# Altium PCB PCB Isolated gate driver module.PcbDoc
Units mil, origin at the board's own origin, x right, y up, seen from the top; angles counter-clockwise.
Board outline 1299.21 x 1230.31 mil, 4 copper layers (Top Layer, Gnd, Vcc, Bottom Layer), stack 76.567 mil thick; 35 components, 20 nets, 101 pads, 13 vias.
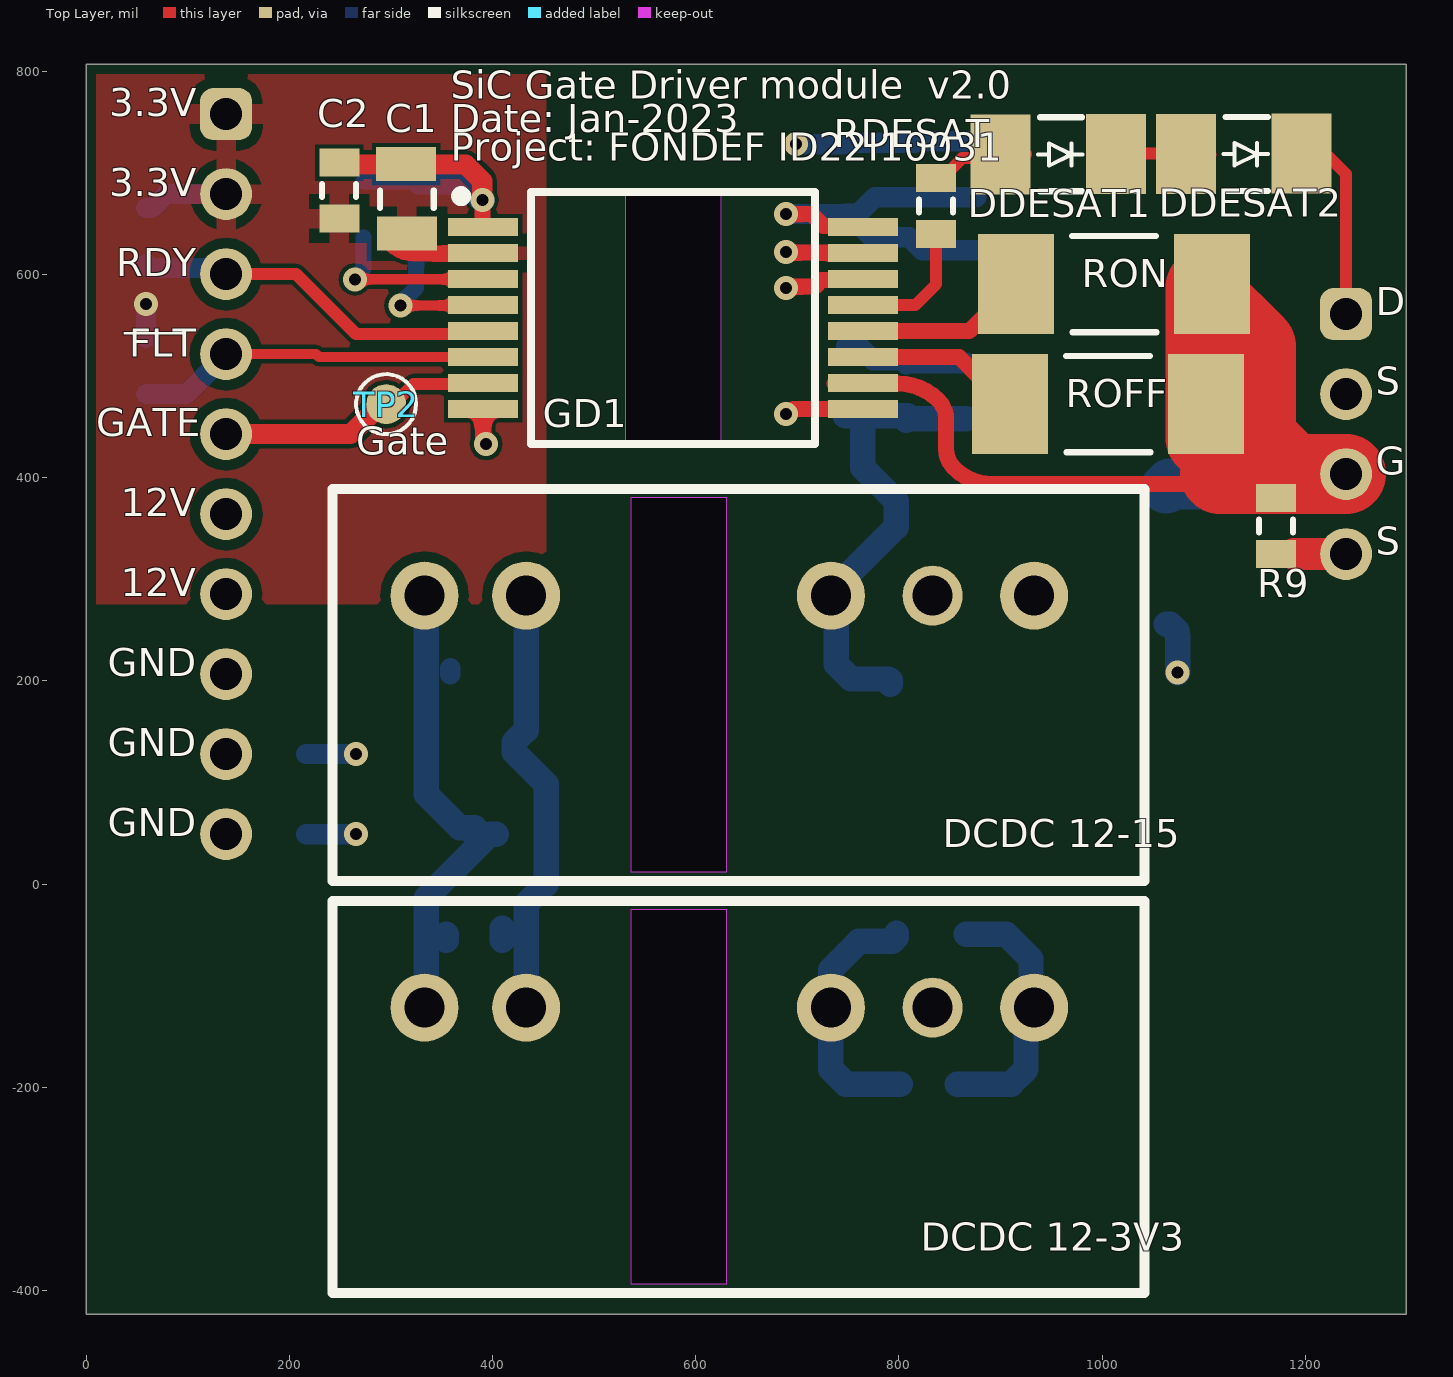
[diagram p0: Top Layer view]
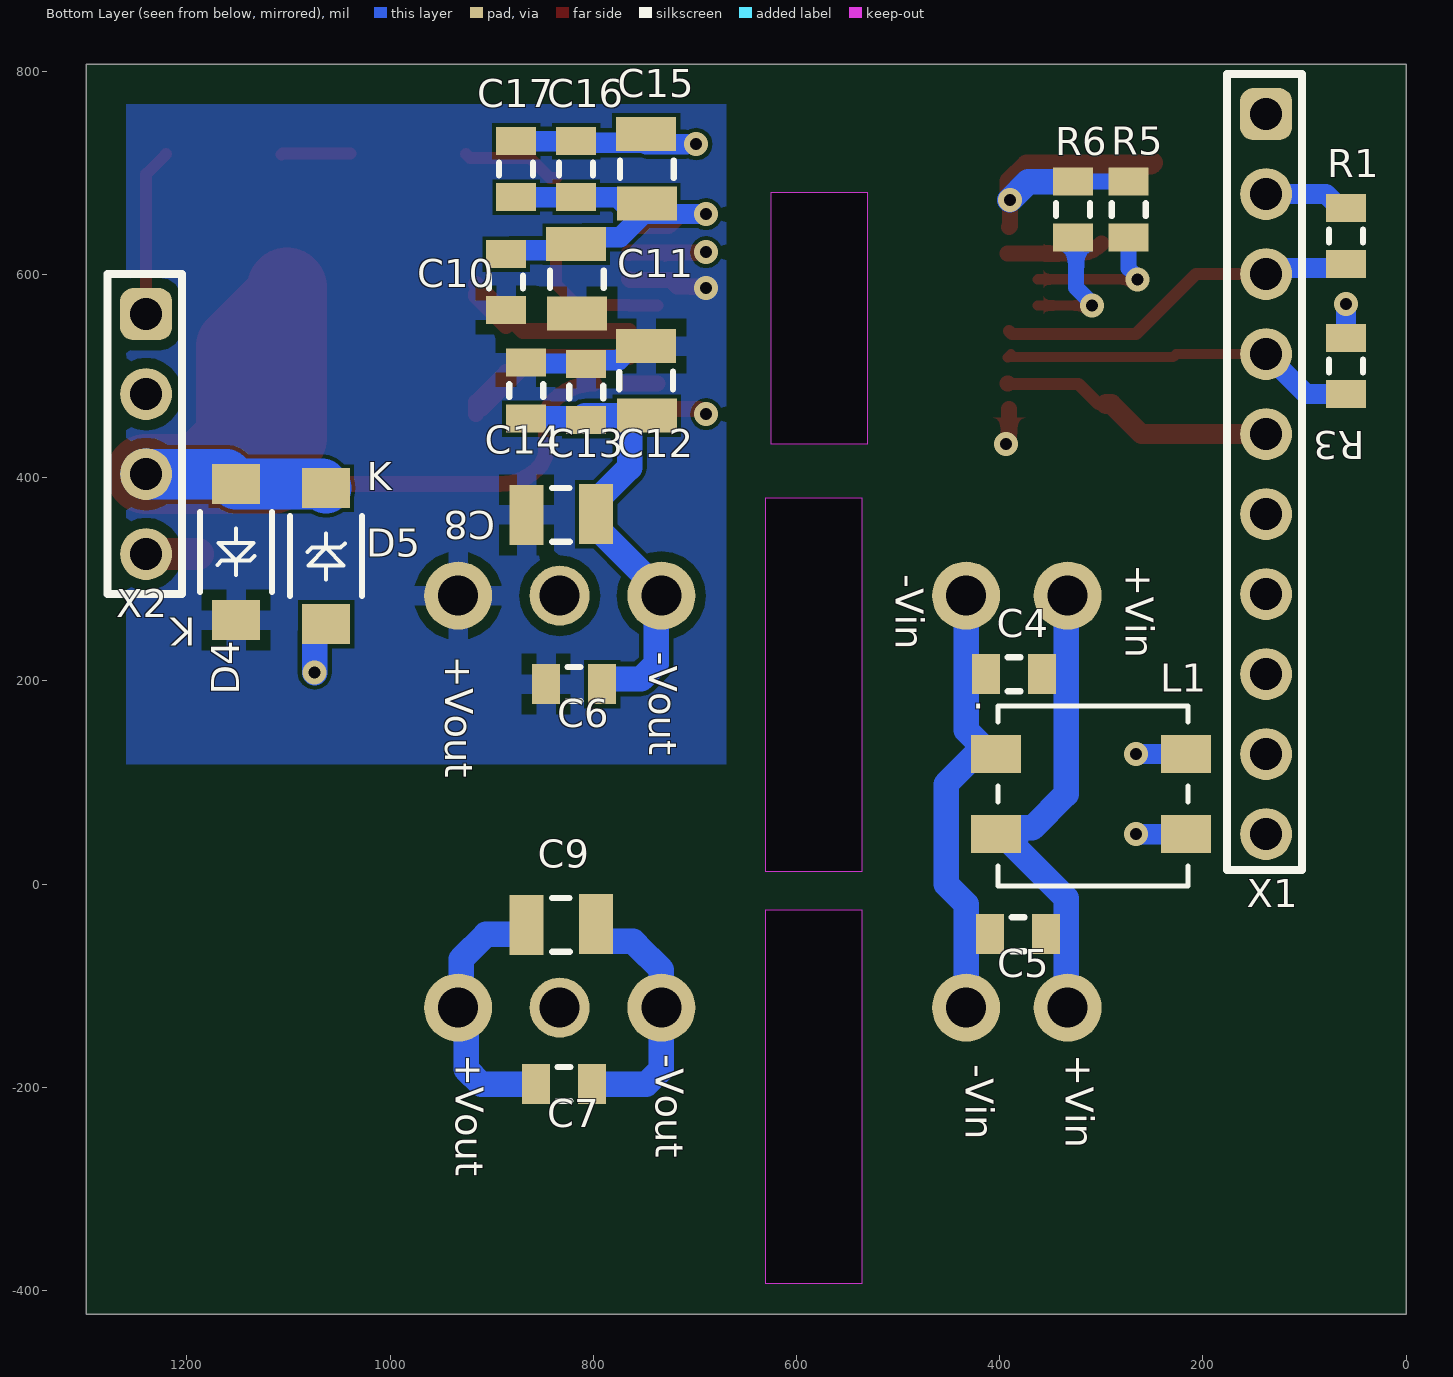
[diagram p1: Bottom Layer view, seen from below]
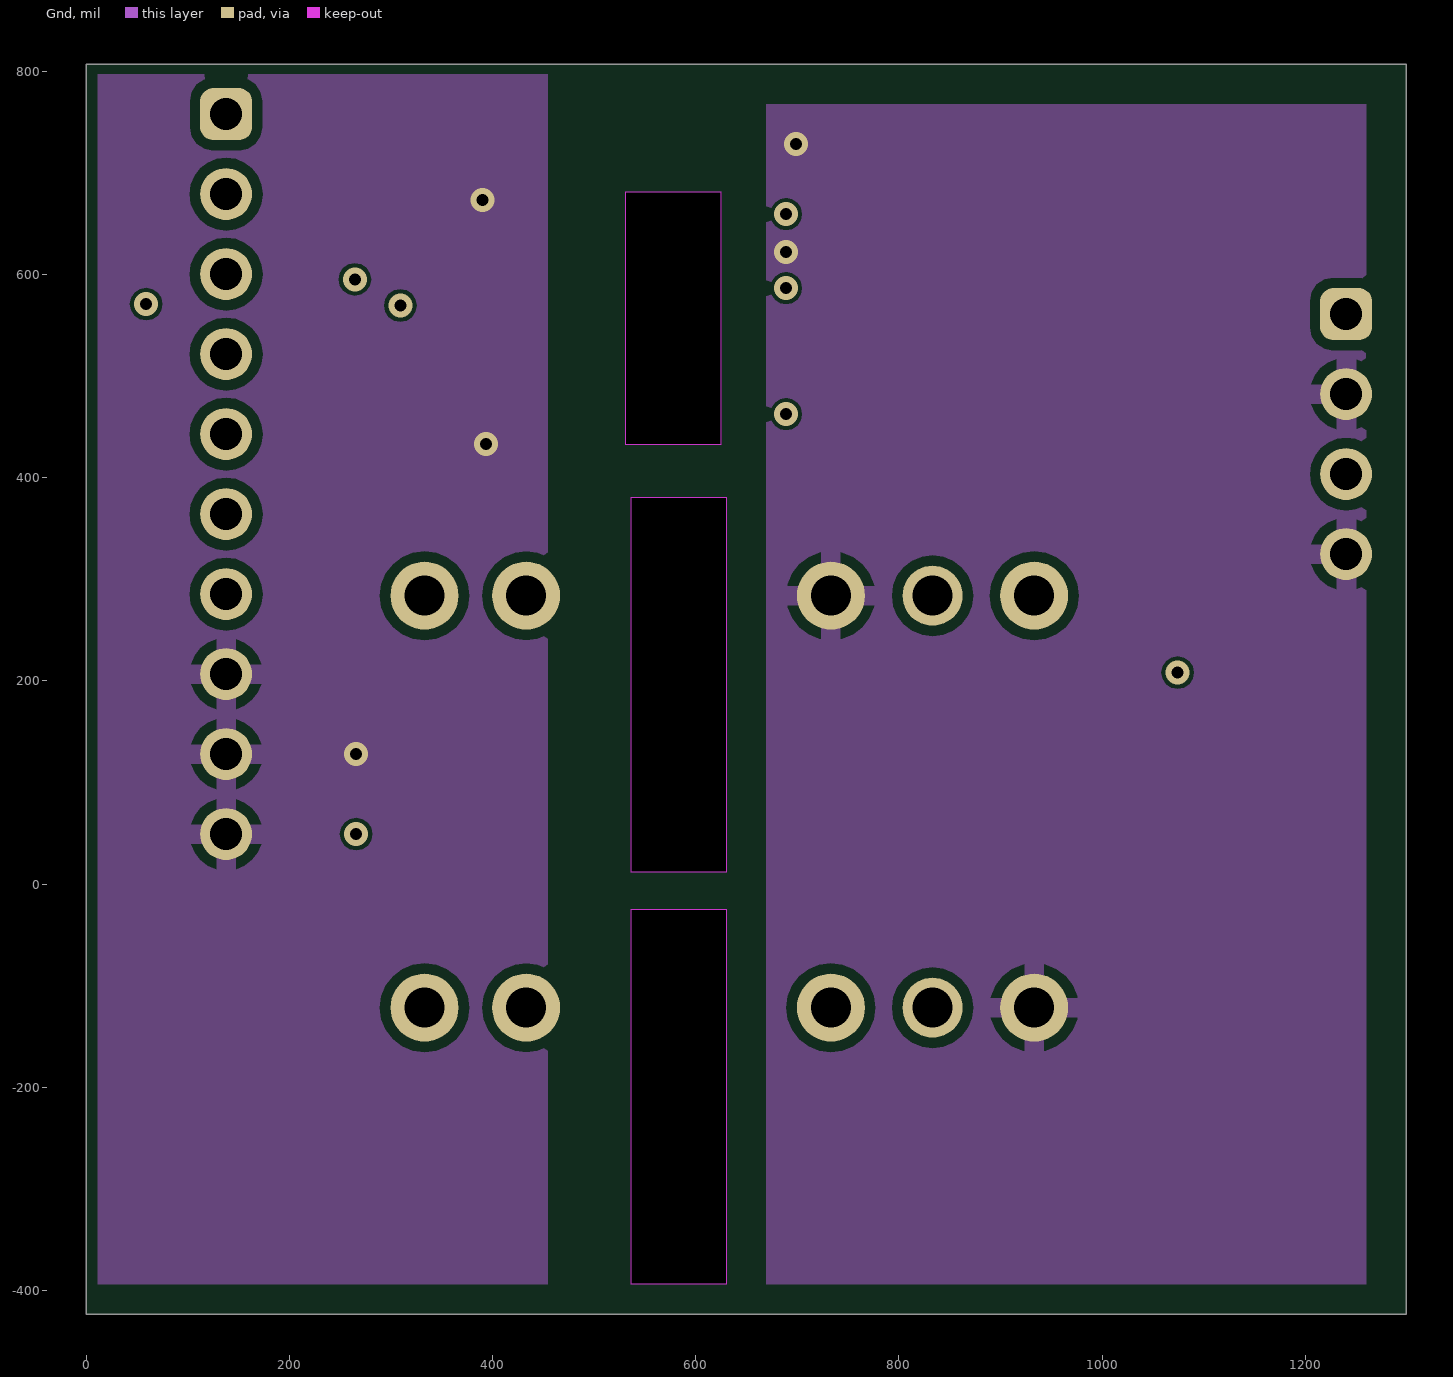
[diagram p2: Gnd]
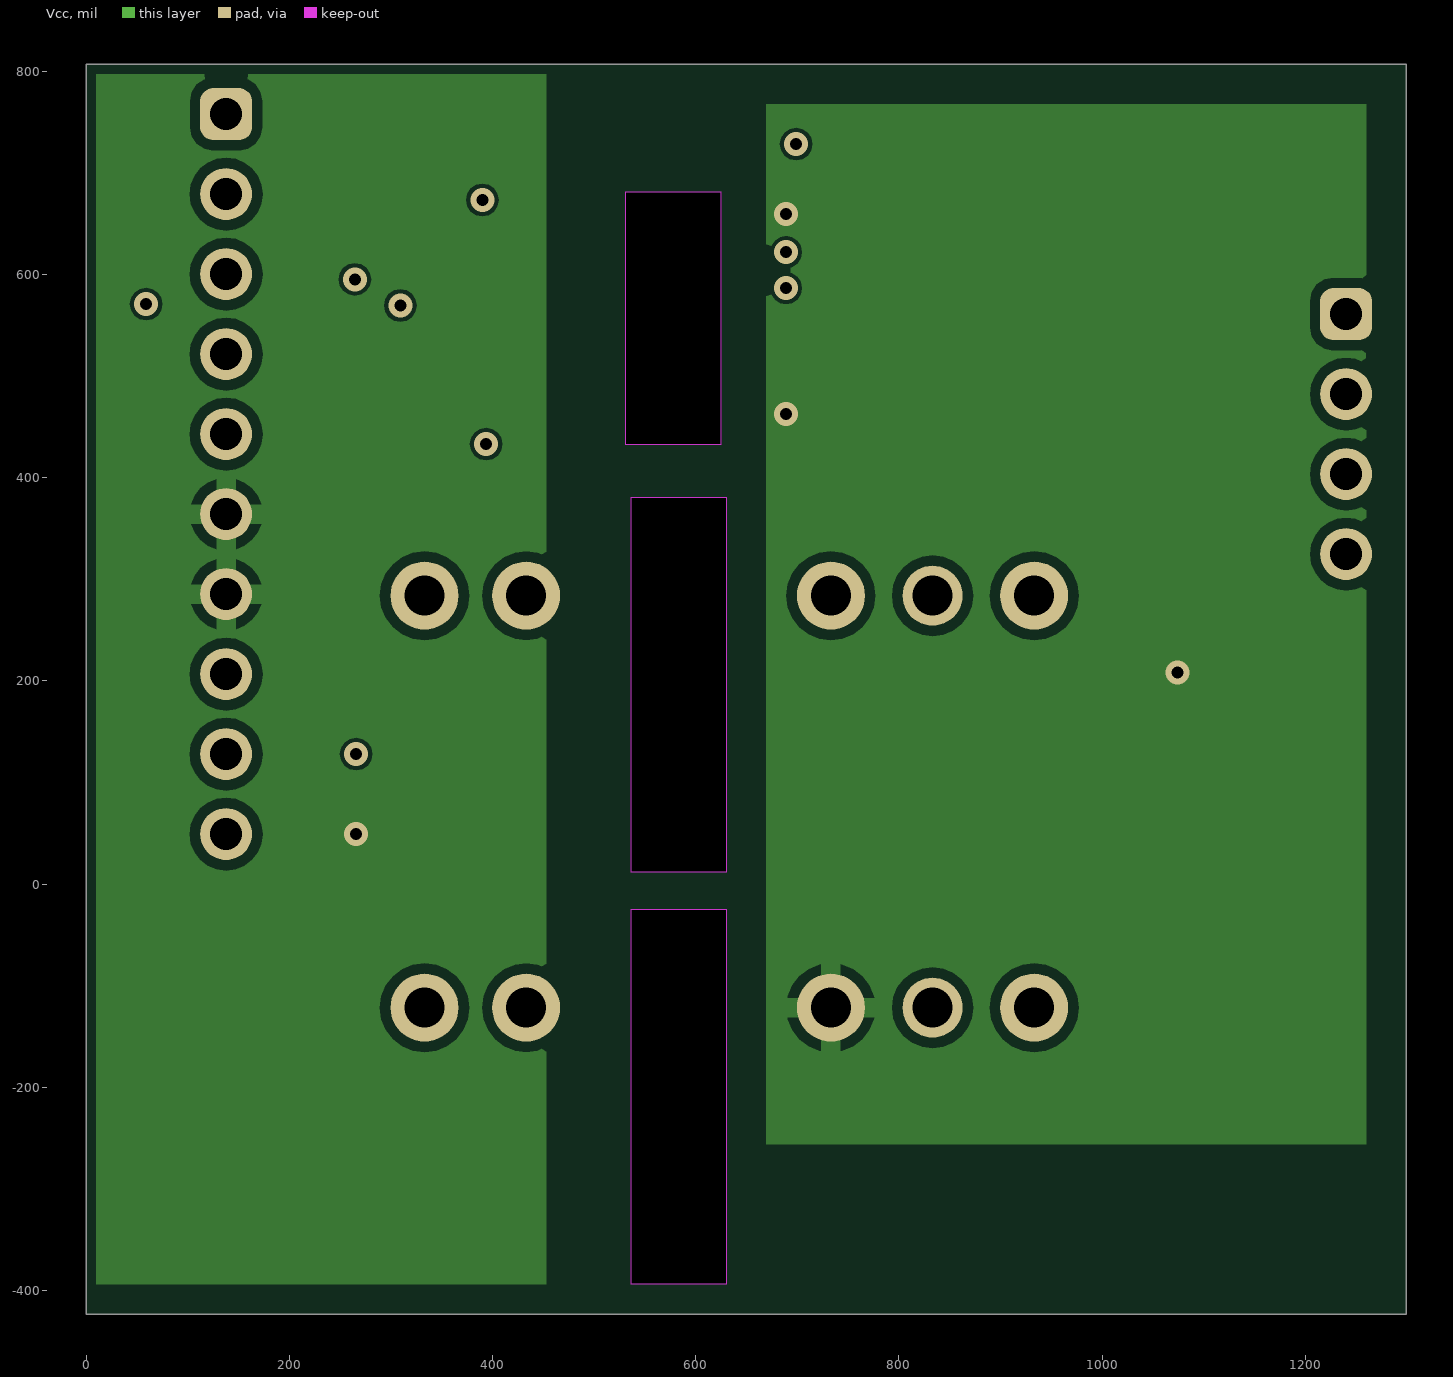
[diagram p3: Vcc]
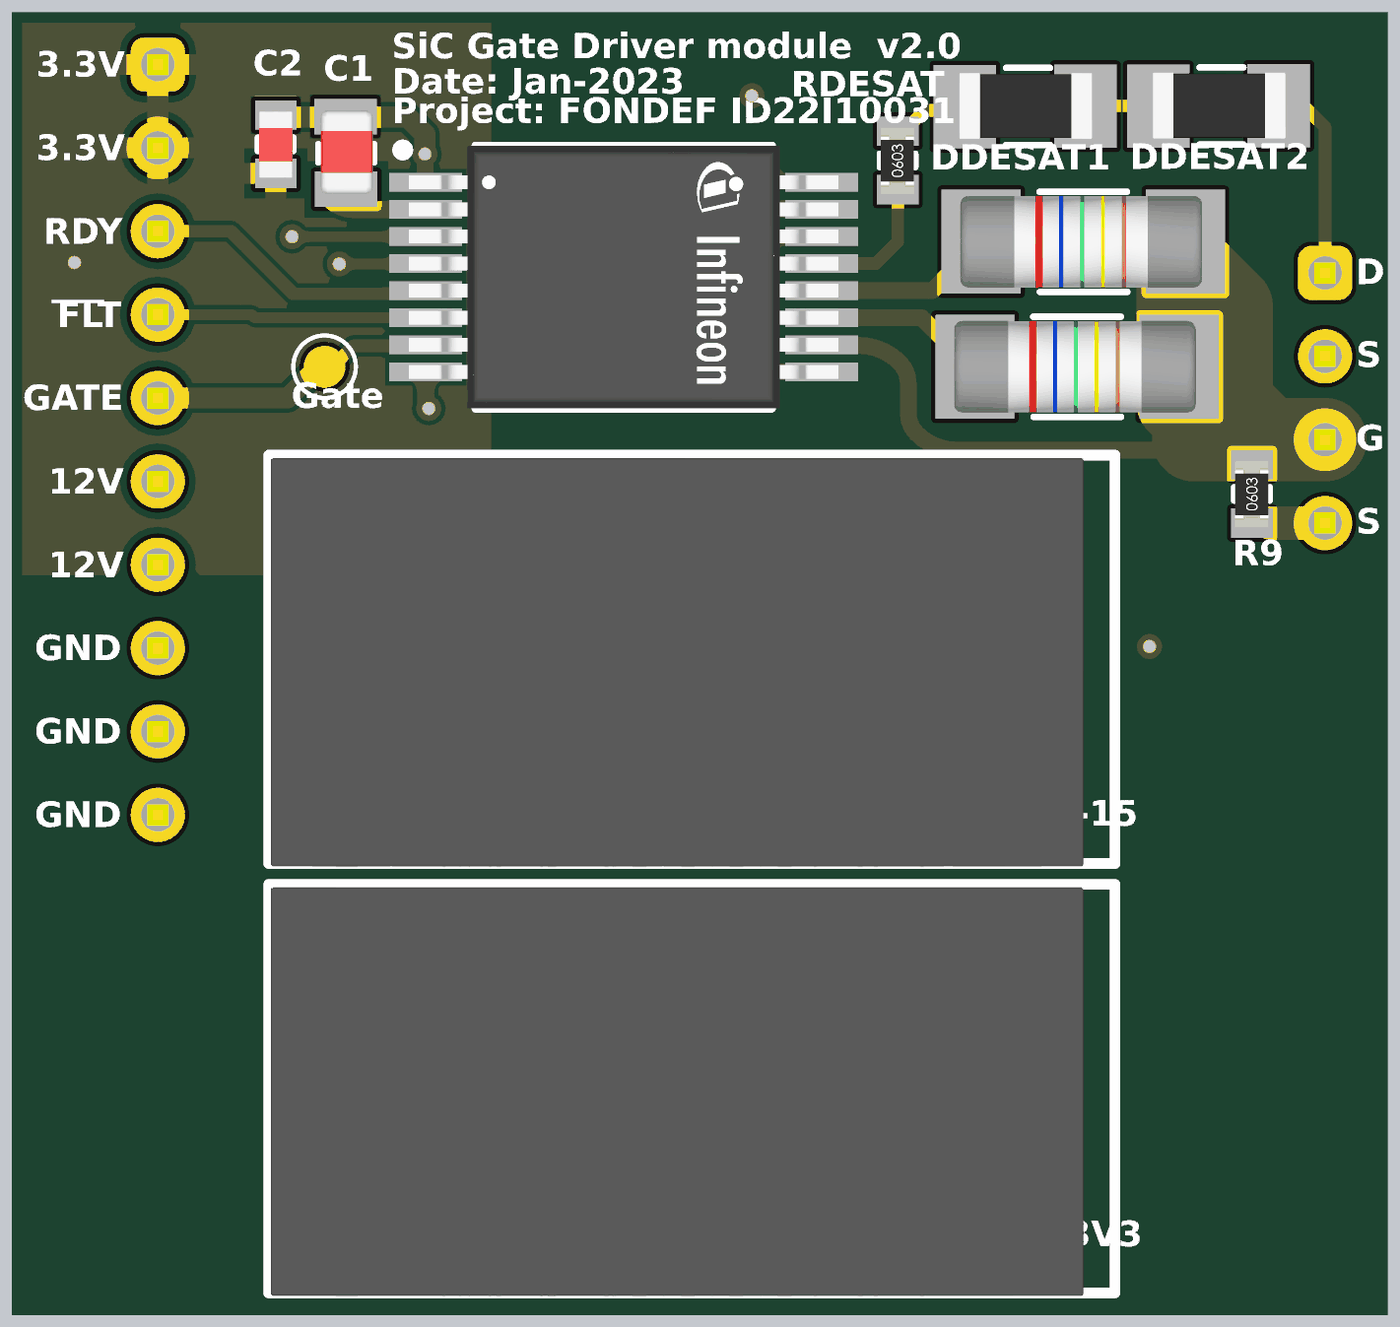
[diagram p4: 3D render of the assembled board from above, using the file's embedded part models]
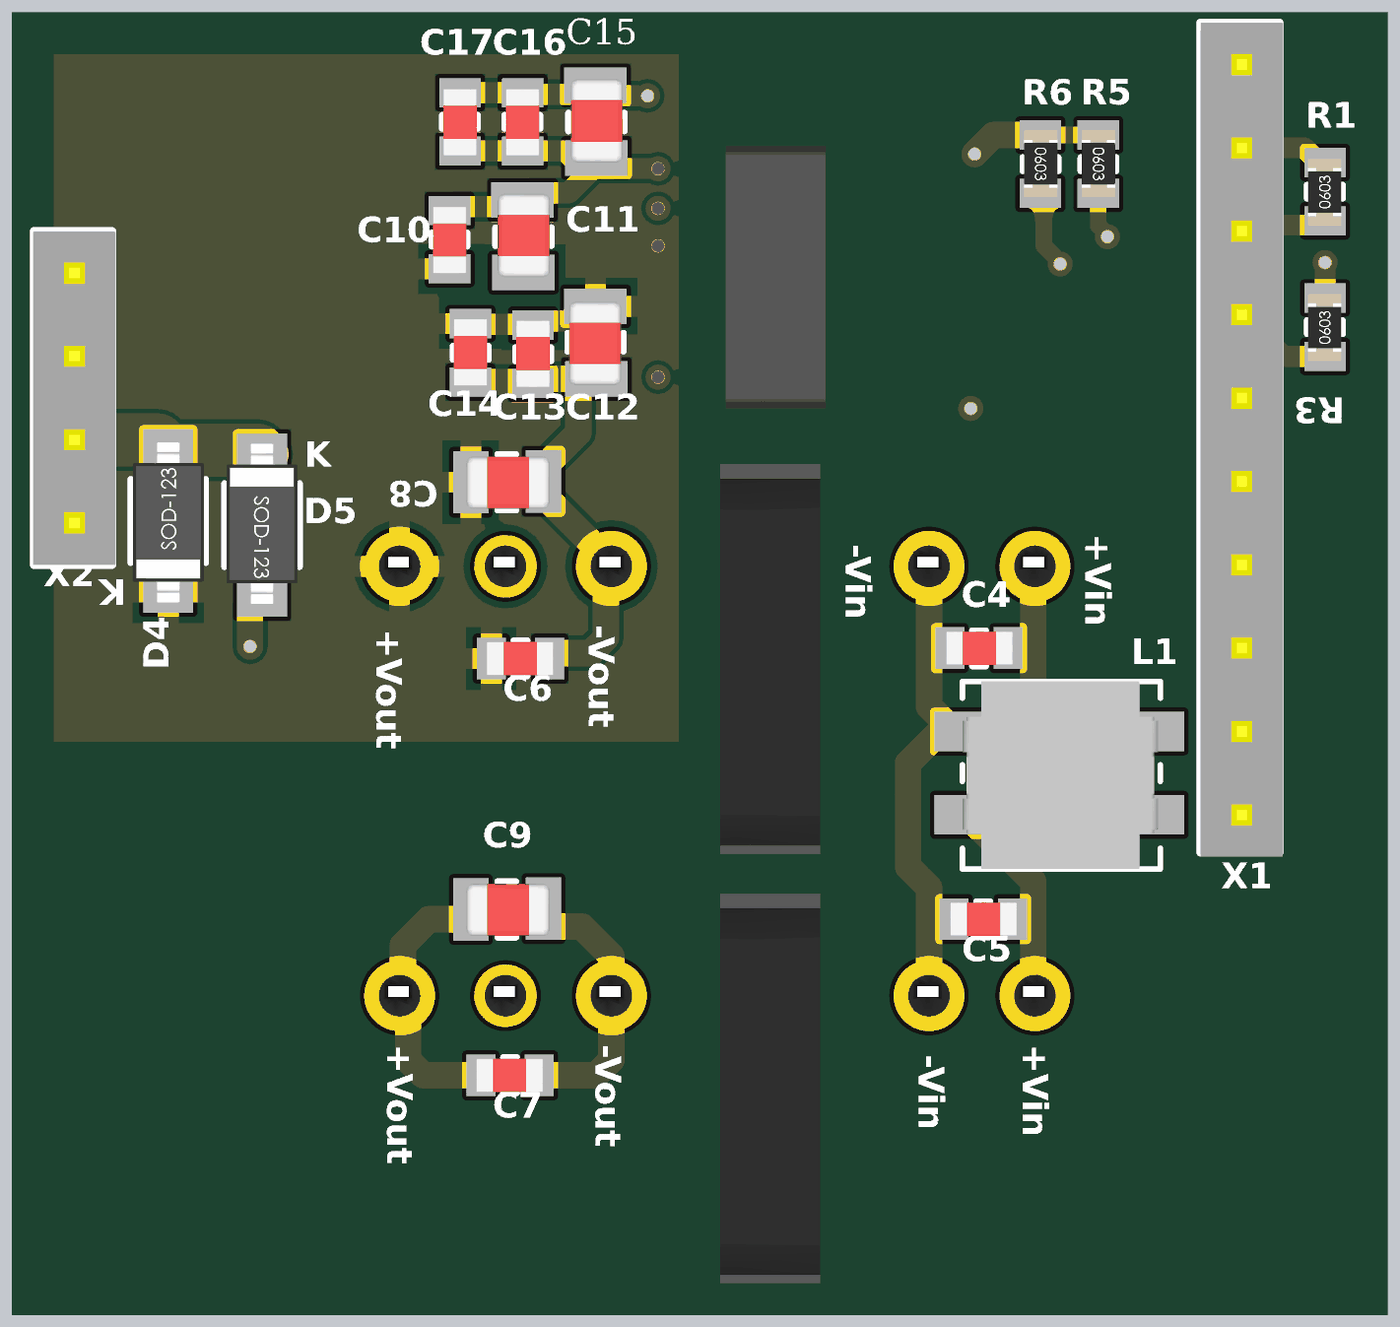
[diagram p5: 3D render of the assembled board from below, using the file's embedded part models]

## Layer stack, top to bottom
Top Solder: solder mask 1, SM-003, Dk 4
Top Layer: signal copper 4.2008
Dielectric 1: core 10, FR-4, Dk 4.2
Gnd: signal copper 4.2008
Dielectric 3: prepreg 39.7638, Dk 4.2
Vcc: signal copper 4.2008
Dielectric 2: core 10, FR-4, Dk 4.2
Bottom Layer: signal copper 4.2008
Bottom Solder: solder mask 1, SM-003, Dk 4

## Board outline
0,-423.23 0,807.09 1299.21,807.09 1299.21,-423.23

## Design rules (kind name [scope] priority, off if disabled: settings)
Clearance [All] p1: gap=3.94 ignorepadtopadclearanceinfootprint=FALSE except(3: Arc-Via Track-Via Fill-Fill Fill-Poly Fill-Region Poly-Poly Poly-Region Region-Region; 5: Arc-Arc Arc-Track Track-Track SMDPad-SMDPad; 5.91: SMDPad-Text THPad-Text Via-Text; 7.87: Arc-SMDPad Arc-THPad Track-SMDPad Track-THPad SMDPad-THPad; 10: THPad-Fill THPad-Poly THPad-Region Via-Via)
ComponentClearance [All] p1: gap=0 collisioncheckmode=3 verticalgap=0 showdistances=FALSE
Height [All] p1: minheight=0 maxheight=3937.01 prefheight=500
HoleSize [All] p1: absolutevalues=TRUE maxlimit=157.48 minlimit=7.87 maxpercent=80.000 minpercent=20.000
MinimumSolderMaskSliver [All] p1: minsoldermaskwidth=1.97
PolygonConnect GD_Chip [All vs HasFootprint('SOP65P1030X265-16N-1')] p1: thpad.connectstyle=Relief thpad.reliefconductorwidth=19.68 thpad.reliefentries=4 thpad.polygonreliefangle="90 Angle" thpad.airgapwidth=10 smdpad.connectstyle=Relief smdpad.reliefconductorwidth=13.78 smdpad.reliefentries=4 smdpad.polygonreliefangle="90 Angle" smdpad.airgapwidth=10 via.connectstyle=Relief via.reliefconductorwidth=19.68 via.reliefentries=4 via.polygonreliefangle="90 Angle" via.airgapwidth=10
PolygonConnect VIA [All vs IsVia] p2: connectstyle=Direct reliefconductorwidth=19.68 reliefentries=4 polygonreliefangle="90 Angle" airgapwidth=10
PolygonConnect [All] p3: connectstyle=Relief reliefconductorwidth=19.68 reliefentries=4 polygonreliefangle="90 Angle" airgapwidth=10
RoomDefinition GD1 [InComponentClass('GD1')] p1: confinementstyle=ConfineIn formatcopy=TRUE lockcomponents=FALSE outline 0,807.09 0,-423.23 1299.21,-423.23 1299.21,807.09
RoutingVias [All] p1: holewidth=28 width=50 viastyle="Through Hole" minholewidth=28 minwidth=50 maxholewidth=28 maxwidth=50
SilkToSilkClearance [All] p1: silktosilkclearance=0
SilkToSolderMaskClearance [IsPad] p1: minsilkscreentomaskgap=0 clearancetoexposedcopper=TRUE
SolderMaskExpansion [All] p1: expansion=4 istentingtop=FALSE
Width [All] p1: maxlimit=157.48 minlimit=10 preferedwidth=19.68
24 further rules are at their usual default settings.

## Components (designator, comment, footprint, x,y, rotation, side; value= is the part's Value field where it differs from the comment)
C1 "1uF" CAP_0805 315.75,640.16 r180 top
C2 "100nF" CAP_0603 249.21,655.03 r180 top
C4 "100nF" CAP_0603 358.27,206.69 r270 bottom
C5 "100nF" CAP_0603 354.33,-49.21 r270 bottom
C6 "100nF" CAP_0603 846.46,196.85 r90 bottom
C7 "100nF" CAP_0603 856.3,-196.85 r90 bottom
C8 "2.2uF" CAP_0805 865.75,363.39 r90 bottom
C9 "2.2uF" CAP_0805 865.75,-40.16 r90 bottom
C10 "68nF" CAP_0603 885.83,564.96 r0 bottom
C11 "1uF" CAP_0805 816.14,561.42 r0 bottom
C12 "4.7uF" CAP_0805 748.03,529.53 r180 bottom
C13 "100nF" CAP_0603 807.09,511.81 r180 bottom
C14 "10nF" CAP_0603 866.14,513.19 r180 bottom
C15 "4.7uF" CAP_0805 747.24,669.69 r0 bottom
C16 "100nF" CAP_0603 816.93,676.18 r0 bottom
C17 "10nF" CAP_0603 875.98,676.18 r0 bottom
D4 "Schottky" SOD-123 1151.57,259.84 r0 bottom
D5 "Schottky" SOD-123 1062.99,389.76 r180 bottom
"DCDC 12-3V3" "DCDC+3V3" DC-DC-GEN 333.07,-121.6 r0 top
"DCDC 12-15" "DCDC+15V" DC-DC-GEN 333.07,283.93 r0 top
DDESAT1 "CURN105-HF" DIODE_1206 1014.16,718.1 r270 top
DDESAT2 "CURN105-HF" DIODE_1206 1196.85,718.5 r270 top
GD1 "1ED3431MU12MXUMA1" SOP65P1030X265-16N-1 577.76,557.09 r0 top
L1 "1.4kOhm / 100MHz" CHOKE_CM_4.7X4.5MM 403.54,49.21 r180 bottom
R1 "2.2k" RES_0603 59.06,610.24 r0 bottom
R3 "2.2k" RES_0603 59.05,482.28 r0 bottom
R5 "1.91k" RES_0603 273.23,691.34 r180 bottom
R6 "1.33k" RES_0603 327.95,691.34 r180 bottom
R9 "10k" RES_0603 1171.26,324.8 r180 top
RDESAT "1k" RES_0603 836.61,639.76 r180 top
ROFF "7.5" RES_MMB_0207 1102.36,472.44 r270 top
RON "7.5" RES_MMB_0207 1108.27,590.55 r270 top
TP2 "Gate" TP_1mm 295.28,472.44 r0 top
X1 "FROM_CONTROL" TMM-110-01-G-S 137.8,403.54 r270 bottom
X2 "TO_POWER" TMM-104-01-G-S 1240.16,442.91 r270 bottom

## Footprints (in the part's own frame and the unit in brackets; to place one, negate y for a bottom-side part, rotate by r counter-clockwise, add the part's x,y. Pads: shape width x height; smd on the part's side, far side on the other; paste and mask are expansions set on the pad)
CAP_0603 [mm] "CAP CER 0603"
  rect 1x0.7 smd: 1(0,0) 2(0,-1.4)
  silkscreen extent -0.42,-0.86 0.43,-0.54, body extent -0.4,-1.49 0.4,0.11, height 0.3
CAP_0805 [mm] "CAP CER 0805"
  rect 1.5x0.85 smd: 1(0,0) 2(0.02,-1.74)
  silkscreen extent -0.67,-1.08 0.67,-0.64, body extent -0.63,-1.89 0.62,0.11, height 0.78
CHOKE_CM_4.7X4.5MM [mm] "CHOKE_CM_4.7x4.5mm"
  rect 1.25x0.95 smd: 1(0,2) 2(0,0) 3(4.75,0) 4(4.75,2)
  silkscreen extent 0.05,-1.3 4.8,3.2, body extent 0.05,-1.3 4.75,3.2, height 1.88
DC-DC-GEN [mm] "DC DC CONVERTER  SIP 7"
  round 1.7 hole 1: 1(0,0) 2(2.54,0) 5(10.16,0) 7(15.24,0)
  round 1.5 hole 1: 6(12.7,0)
  Keep-Out Layer board cut-out: 7.55,-6.9 7.55,2.45 5.15,2.45 5.15,-6.9
  silkscreen extent -2.3,-7.13 18,2.67, body extent -2.25,-7.22 17.25,2.6, height 12.5
DIODE_1206 [mm]
  rect 2x1.5 smd: A(0,-2.9) K(-0.01,-0.01)
  silkscreen extent -0.93,-1.97 0.92,-0.85, body extent -0.82,-3.04 0.78,0.16, height 1.1
RES_0603 [mm] "RES 0603"
  rect 1x0.7 smd: 1(0,0) 2(0,-1.4)
  silkscreen extent -0.42,-0.86 0.43,-0.54, body extent -0.39,-1.49 0.41,0.11, height 0.45
RES_MMB_0207 [mm] "RES 1206"
  rect 2.5x1.9 smd: 1(0,0) 2(0,-4.9)
  silkscreen extent -1.2,-3.5 1.2,-1.39, body extent -1.1,-5.4 1.1,0.4, height 2.2
SOD-123 [mm] "SOD-123"
  rect 1.2x1 smd: A(0,-3.4) K(0,0)
  silkscreen extent -0.9,-2.7 0.9,-0.7, body extent -0.85,-3.59 0.85,0.26, height 1.42
SOP65P1030X265-16N-1 [mm] "SOP,0.65mm,pitch;16 pin,7.50mm W X 6.30mm L X 2.65mm H body"
  rect 1.75x0.45 smd paste+0 mask+0: 1(-4.75,2.275) 2(-4.75,1.625) 3(-4.75,0.975) 4(-4.75,0.325) 5(-4.75,-0.325) 6(-4.75,-0.975) 7(-4.75,-1.625) 8(-4.75,-2.275) 9(4.75,-2.275) 10(4.75,-1.625) 11(4.75,-0.975) 12(4.75,-0.325) 13(4.75,0.325) 14(4.75,0.975) 15(4.75,1.625) 16(4.75,2.275)
  Keep-Out Layer board cut-out: 1.2,-3.15 1.2,3.15 -1.2,3.15 -1.2,-3.15
  silkscreen extent -5.42,-3.15 3.55,3.17, body extent -5.15,-3.15 5.15,3.15, height 2.65
TMM-104-01-G-S [mm] "Connector Header Through Hole 4 position 0.079\" (2.00mm)"
  rrect50% 1.3x1.3 hole 0.8: 1(-3,0)
  round 1.3 hole 0.8: 2(-1,0) 3(1,0) 4(3,0)
  silkscreen extent -4,-0.97 4,0.9, body extent -4,-0.99 4,0.99, height 4.7
TMM-110-01-G-S [mm] "Connector Header Through Hole 10 position 0.079\" (2.00mm)"
  rrect50% 1.3x1.3 hole 0.8: 1(-9,0)
  round 1.3 hole 0.8: 2(-7,0) 3(-5,0) 4(-3,0) 5(-1,0) 6(1,0) 7(3,0) 8(5,0) 9(7,0) 10(9,0)
  silkscreen extent -10,-0.98 9.9,0.9, body extent -10,-0.99 10,0.99, height 4.7
TP_1mm [mm]
  round 1 smd paste-1: 1(0,0)
  silkscreen extent -0.75,-0.75 0.75,0.75

## Part data
C1 C11: library part Cap_0805, "1µF ±10% 50V Ceramic Capacitor X7R 0805 (2012 Metric)", MPN=C0805C105K5RACAUTO, Package=0805, Created=2020_06_15_DAarancibia, MF=KEMET, MFP=C0805C105K5RACAUTO
C2 C4 C5 C6 C7 C10 C13 C16: library part Cap_0805, "0.1µF ±10% 50V Ceramic Capacitor X7R 0603 (2012 Metric)", MPN=C0805C104K5RACTU, Package=0603, Created=2022_12_31, MF=KEMET
  C2 C4 C5 C6 C7 C13 C16: MFP=C0603C104K5RAC3121
  C10: MFP=C0603C683J5RACTU
C8 C9: library part Cap_0805, "2.2µF ±10% 50V Ceramic Capacitor X7R 0805 (2012 Metric)", Package=0805, MF=KEMET, MFP=C0805X225K5RACAUTO
  C8: Created=2022_12_31
  C9: Created=2022_31_12
C12 C15: library part Cap_0805, "4.7µF ±10% 35V Ceramic Capacitor X7R 0805 (2012 Metric)", Package=0805, Created=2022_12_31, MF=murata, MFP=GRM21BZ7YA475ME15L
C14 C17: library part Cap_0805, "0.01µF ±10% 50V Ceramic Capacitor X7R 0603 (2012 Metric)", MPN=C0805C104K5RACTU, Package=0603, Created=2022_12_31, MF=KEMET, MFP=C0603C103J5RACTM
D4 D5: library part Diode_Schottky_30V/1A, "Diode Schottky 30 V 1A Surface Mount PG-SOD323-2", MPN=BAS3010B03WE6327HTSA1, Package="SC-76, SOD-323", Supplier Part Number 1=BAS3010B03WE6327HTSA1CT-ND, Created=2021_05_16_EDuran, MF="Infineon Technologies", MFP=BAS3010B03WE6327HTSA1, Supplier 1=Digi-Key
"DCDC 12-3V3": library part DC_DC_123V3, "ISOLATED DC-DC CONVERTER 12V INPUT, 3.3V OUTPUT", MPN="TMV 1203SHI", Package="7-SIP Module, 5 Leads", Created=2022_12_31, MF=TRACO, MFP="TMV 1203SHI"
"DCDC 12-15": library part DC_DC_1215, "ISOLATED DC-DC CONVERTER 12V INPUT, 15V OUTPUT", MPN="TBA 1-1213HI", Package="7-SIP Module, 5 Leads", Created=2022_12_31, MF=TRACO, MFP="TBA 1-1213HI"
DDESAT1 DDESAT2: library part Diode_2, "Diode Standard 1000V 1A Surface Mount 1206", Package=1206, Created=2022_31_12, MFP=CURN105-HF
GD1: library part 1ED3431MU12M, "3A Gate Driver Capacitive Coupling - Channel PG-DSO-16-28", Package=PG-DSO-16-28, Supplier Part Number 1=448-1ED3431MU12MXUMA1CT-ND, Created=2021_05_15_EDuran, MF="Infineon Technologies", MPN=1ED3431MU12MXUMA1, Supplier 1=Digi-Key
L1: library part Choke_CM_ACM4520, "2 Line Common Mode Choke Surface Mount 1.4 kOhms @ 100MHz 1.7A DCR 80mOhm", MPN=ACM4520-142-2P-T000, Package="4.70mm x 4.50mm", Supplier Part Number 1=445-6136-1-ND, Created=2020_07_28_DAarancibia, MF="TDK Corporation", MFP=ACM4520-142-2P-T000, Supplier 1=Digi-Key
R1 R3: library part Res_0603, "2.2 kOhms ±5% 0.1W, 1/10W Chip Resistor 0603 (1608 Metric) Moisture Resistant Thick Film", Package=0603, Supplier Part Number 1=CR0603-JW-222ELFCT-ND, Created=2020_06_15_DAarancibia, MF="Bourns Inc.", MFP=CR0603-JW-222ELF, Supplier 1=Digi-Key
R5: library part Res_0603, "1.91 kOhms ±1% 0.1W, 1/10W Chip Resistor 0603 (1608 Metric) Moisture Resistant Thick Film", Package=0603, Supplier Part Number 1=311-1.91KHRCT-ND, Created=2020_06_15_DAarancibia, MF=Yageo, MFP=RC0603FR-071K91L, Supplier 1=Digi-Key
R6: library part Res_0603, "1.33 kOhms ±1% 0.1W, 1/10W Chip Resistor 0603 (1608 Metric)", Package=0603, Created=2022_31_12, MF=YAGEO, MFP=RC0603FR-071K33L
R9: library part Res_0603, "10 kOhms ±5% 0.1W, 1/10W Chip Resistor 0603 (1608 Metric) Moisture Resistant Thick Film", Package=0603, Supplier Part Number 1=YAG1309CT-ND, Created=2020_06_15_DAarancibia, MF=Yageo, MFP=RC0603JR-0710KP, Supplier 1=Digi-Key
RDESAT: library part Res_0603, "1 kOhms ±5% 0.25W, 1/4W Chip Resistor 0603 (1608 Metric) Automotive AEC-Q200, Pulse Withstanding Thick Film", Package=0603, Supplier Part Number 1=YAG6166CT-ND, Created=2020_06_15_DAarancibia, MF=Yageo, MFP=SR0603JR-7T1KL, Supplier 1=Digi-Key
ROFF RON: library part Res_MELF_0207, "7.5 Ohms ±1% 1W Chip Resistor MELF, 0207 Anti-Sulfur, Automotive AEC-Q200 Thin Film", Package="MELF 0207", Created=2022_12_31, MF="Vishay Beyschlag"
  ROFF: MFP=WRM0207HPC-7R5FT2.
  RON: MFP=WRM0207HPC-7R5FT2
TP2: "Testpoint 1mm", Created=2018_06_25_AGeiger
X1: library part Con_Header_Male_6, "Connector Header Through Hole 10 position 0.079\" (2.00mm)", MPN=TMM-110-01-G-S, Package="Through Hole, pitch 0.079\" (2.00mm)", Supplier Part Number 1=SAM1174-10-ND, Created=2021_05_24_EDuran, MF="Samtec Inc.", MFP=TMM-110-01-G-S, Supplier 1=Digi-Key
X2: library part Con_Header_Male_5, "Connector Header Through Hole 4 position 0.079\" (2.00mm)", MPN=TMM-104-01-G-S, Package="Through Hole, pitch 0.079\" (2.00mm)", Supplier Part Number 1=SAM1174-04-ND, Created=2021_05_24_EDuran, MF="Samtec Inc.", MFP=TMM-104-01-G-S, Supplier 1=Digi-Key

## Via types
v1: diameter 23.62, hole 11.81, Top Layer to Bottom Layer, tented both sides, 13 vias

## Nets (pads, with @x,y where several pads share a name; then routed paths per layer and width w, separated by ;. In a path a pad name is that pad's centre, name@x,y a point inside that pad or via, vN(x,y) a via of type N, cw(c..) or ccw(c..) an arc to the next point about the centre after c; other vN are vias at no path point)
3.3V: C1.1 C2.1 GD1.2 R1.2 R3.2 X1.1 X1.2 | length 212.6
  Top Layer w15.75: C1.1@300,630.32 ccw(c323.29,653.6) 323.29,620.67 GD1.2@392.13,620.67
  Bottom Layer w19.68: R3.2 v1(59.06,570.87) ; R1.2 64.96,665.35 78.74,679.13 X1.2
12V: L1.3 X1.6 X1.7 | length 49.2
  Bottom Layer w20: L1.3 v1(265.75,49.21)
+15V_ISO: "DCDC 12-15.7" C6.1 C8.1 C10.1 C11.1 C12.1 C13.1 C14.1 D4.K GD1.14 | length 207.1
  Top Layer w15.75: v1@687.32,586.61 688.82,588.12 717.42,588.12 723.79,594.49 763.78,594.49 GD1.14
  Bottom Layer w20: C12.1 760.83,529.53 774.77,515.59 803.31,515.59 C13.1 807.78,512.5 865.45,512.5 C14.1
  other v1: 688.98,586.61
-3.3V_ISO: "DCDC 12-3V3.5" C7.2 C9.2 C10.2 C11.2 C15.1 C16.1 C17.1 D5.A GD1.9 GD1.16 | length 813.5
  Top Layer w15.75: v1(688.98,462.6) 691.11,462.6 696.03,467.52 GD1.9 ; v1(688.98,659.45) 714.08,659.45 725.89,647.64 763.78,647.64 GD1.16
  Bottom Layer w15.75: v1(688.98,659.45) v1@689.17,659.64 ; C15.1@747.05,659.64 C15.1@747.24,659.84
  Bottom Layer w19.68: v1@689.17,659.64 C15.1@747.05,659.64
  Bottom Layer w20: C15.1@747.24,659.84 C15.1@750.29,659.84 ; C17.1 C16.1 776.38,676.18 760.04,659.84 C15.1@750.29,659.84 ; C10.2 882.05,623.86 822.99,623.86 C11.2 810.2,636.65 773.48,636.65 C15.1@750.29,659.84
  Bottom Layer w25: C9.2@797.64,-48.43 797.64,-52.11 793.41,-56.34 760.59,-56.34 757.87,-59.06 757.87,-59.31 733.07,-84.11 733.07,-182.21 747.72,-196.85 C7.2 ; D5.A 1066.93,255.91 1074.11,248.72 1074.11,244.78 1074.35,244.55 v1(1074.35,208.2)
Drain: DDESAT2.K X2.1 | length 165.6
  Top Layer w11.81: DDESAT2.K@1220.47,718.5 1240.16,698.82 X2.1
Fault: GD1.6 R3.1 X1.4 | length 354
  Top Layer w10: X1.4 226.38,521.65 229.33,518.7 GD1.6 ; GD1.6@388.78,521.65 GD1.6@392.13,518.31
  Bottom Layer w19.68: R3.1 98.43,482.28 X1.4
GND1: C1.2 C2.2 GD1.1 GD1.8 L1.4 R5.1 R6.1 X1.8 X1.9 X1.10 | length 403.3
  Top Layer w15.75: v1(390.04,673.35) 390.04,647.64 390.75,646.93 GD1.1 ; GD1.8 390.75,438.15 393.7,435.2 v1(393.7,433.07)
  Top Layer w20: C2.2 251.09,708.27 C1.2@304.33,708.27 ; C1.2@304.13,708.46 C1.2@304.33,708.27 ; v1(390.04,673.35) 390.04,691.85 373.62,708.27 C1.2@304.33,708.27
  Bottom Layer w15.75: R5.1 R6.1
  Bottom Layer w19.68: L1.4 v1(265.75,127.95)
  Bottom Layer w25: R6.1 372.05,691.34 v1(390.04,673.35)
IN: GD1.7 TP2.1 X1.5 | length 273.9
  Top Layer w12: TP2.1 302.68,472.44 322.37,492.13 389.76,492.13 GD1.7
  Top Layer w15.75: GD1.7@391.99,492.58 GD1.7@392.13,492.72
  Top Layer w19.68: X1.5 260.42,442.91 289.95,472.44 TP2.1
NetC4_1: "DCDC 12-3V3.1" "DCDC 12-15.1" C4.1 C5.1 L1.2 | length 489.5
  Bottom Layer w20: C4.1 C4.1@358.27,212.6
  Bottom Layer w25: 333.07,-121.6 334.65,-120.03 ; 333.07,283.93 334.65,282.35 334.65,88.58 367.82,55.41 382.58,55.41 L1.2@382.58,47.93 ; 341.09,-113.58 334.65,-120.03 ; C5.1@354.33,-55.12 C5.1 ; L1.2 397.64,49.21 334.65,-13.78 334.65,-120.03
NetC4_2: "DCDC 12-3V3.2" "DCDC 12-15.2" C4.2 C5.2 L1.1 | length 443.4
  Bottom Layer w25: C5.2@409.45,-55.12 C5.2 C5.2@409.45,-43.31 ; 433.07,-121.6 433.07,-19.68 452.76,0 452.76,98.43 421.26,129.92 421.26,139.76 433.07,151.57 433.07,283.93
NetDDESAT1_A: DDESAT1.A RDESAT.2 | length 98.4
  Top Layer w11.81: RDESAT.2 842.52,694.88 862.2,714.57 921.26,714.57 DDESAT1.A@925.2,718.5
NetDDESAT1_K: DDESAT1.K DDESAT2.A | length 68
  Top Layer w11.81: DDESAT1.K@1038.99,718.9 1105.89,718.9 DDESAT2.A@1106.68,718.1
NetGD1_3: GD1.3 R5.2 | length 142.6
  Top Layer w10: v1(264.57,595.28) 362.4,595.28 GD1.3@362.6,595.08
  Bottom Layer w15.75: v1(264.57,595.28) 264.57,597.41 273.23,606.07 R5.2
NetGD1_4: GD1.4 R6.2 | length 127.8
  Top Layer w10: v1(309.25,569.49) GD1.4@362.6,569.49
  Bottom Layer w15.75: v1(309.25,569.49) 309.25,571.62 324.8,587.17 324.8,633.07 R6.2
NetGD1_11: GD1.11 ROFF.2 | length 220.4
  Top Layer w15.75: GD1.11 859.25,518.7 ROFF.2@910.43,467.52 ; ROFF.2@885.83,503.94 915.35,474.41 ROFF.2@915.35,462.6
NetGD1_12: GD1.12 RON.2 | length 213.5
  Top Layer w15.75: GD1.12 869.09,544.29 RON.2 ; RON.2@885.83,549.21 915.35,578.74 RON.2@915.35,580.71
NetGD1_13: GD1.13 RDESAT.1 | length 157.8
  Top Layer w11.81: GD1.13@736.61,569.49 GD1.13@764.76,569.49 ; GD1.13 815.94,569.88 836.61,590.55 RDESAT.1
PWR_Gate: D4.A D5.K GD1.10 R9.2 ROFF.1 RON.1 X2.3 | length 1115.2
  Top Layer w15.75: GD1.10@736.61,492.72 GD1.10@769.61,492.72 ; GD1.10@799.14,492.72 cw(c799.14,436.93) 838.58,476.38 ; 838.58,476.38 cw(c819.57,457.37) 846.46,457.37 846.46,428.46 ccw(c873.34,428.46) 854.33,409.45 ccw(c892.35,447.47) 892.35,393.7 1101.58,393.7
  Top Layer w78.74: ROFF.1@1101.58,438.86 RON.1@1101.58,579.13 ; RON.1@1101.58,587.01 RON.1@1101.58,579.13 ; X2.3 1186.89,403.54 ; RON.1@1101.58,579.13 1151.57,529.13 1151.57,438.86 ; 1151.57,438.86 1116.26,403.54 1186.89,403.54 ; 1151.57,438.86 1186.89,403.54
  Bottom Layer w50: D5.K 1066.93,393.7 D4.A 1161.19,403.32 1239.93,403.32 X2.3
Ready: GD1.5 R1.1 X1.3 | length 361.5
  Top Layer w12: X1.3 206.69,600.39 265.75,541.34 350.46,541.34 350.55,541.43 387.89,541.43 GD1.5
  Bottom Layer w19.68: R1.1 62.99,606.3 131.89,606.3 X1.3
Source: "DCDC 12-3V3.7" "DCDC 12-15.5" C6.2 C7.1 C8.2 C9.1 C12.2 C13.2 C14.2 C15.2 C16.2 C17.2 GD1.15 R9.1 X2.2 X2.4 | length 1059.4
  Top Layer w15.75: v1@687.32,622.05 687.81,621.56 764.27,621.56 GD1.15
  Top Layer w31.5: R9.1@1188.98,324.8 X2.4 X2.4@1234.88,319.53
  Bottom Layer w20: v1@708.66,728.35 748.03,728.35 749.51,729.82 815.45,729.82 C16.2 C17.2 ; C13.2@811.36,458.07 C13.2@816.93,458.07
  Bottom Layer w23.62: X2.4@1239.96,324.61 X2.4
  Bottom Layer w25: C12.2 C12.2@760.04,461.02 ; C6.2 791.34,200.61 790.06,201.89 752.83,201.89 738.19,216.54 738.19,278.81 733.07,283.93 728.35,279.2 728.35,282.48 797.24,351.38 C8.2 797.24,376.97 764.27,409.94 764.27,456.79 C12.2@760.04,461.02 ; C13.2 808.37,457.97 816.83,457.97 816.93,458.07 C14.2 ; C13.2@811.36,458.07 808.4,461.02 C12.2@760.04,461.02 ; C7.1@857.58,-196.85 910.4,-196.85 925.05,-182.21 925.05,-129.83 930,-124.88 930,-73.7 905.73,-49.43 866.36,-49.43 C9.1@866.14,-49.21
  other v1: 688.98,622.05 698.82,728.35
pads on no net: "DCDC 12-3V3.6" "DCDC 12-15.6"

## Polygon pours and split planes (outlines as drawn)
-3.3V_ISO on Vcc "-3.3V_ISO_L03_P004" (solid, pour order 4): 1259.84,767.72 1259.84,-255.91 669.29,-255.91 669.29,767.72
12V on Vcc "12V_L03_P002" (solid, pour order 2): 452.76,797.24 9.84,797.24 9.84,-393.7 452.76,-393.7
Source on Gnd "SOURCE_L02_P011" (solid, pour order 11): 1259.84,767.72 1259.84,-393.7 669.29,-393.7 669.29,767.72
GND1 on Gnd "GND1_L02_P003" (solid, pour order 3): 11.64,797.24 11.64,-393.7 454.55,-393.7 454.55,797.24
3.3V on Top Layer "3.3V_L01_P017" (solid, pour order 17): 9.84,797.24 452.76,797.24 452.76,275.59 9.84,275.59
+15V_ISO on Bottom Layer "+15V_ISO_L04_P019" (solid, pour order 19): 1259.84,767.72 1259.84,118.11 669.29,118.11 669.29,767.72

## Silkscreen, mask and mechanical layers (free items; w line width, h text height)
Top Overlay:
  text "SiC Gate Driver module  v2.0" at 358.66,763.78 h47.24
  text "3.3V" at 22.65,746.5 h47.24
  text "Date: Jan-2023" at 358.66,730.47 h47.24
  text "Project: FONDEF ID22I10031" at 358.66,702.76 h47.24
  text "3.3V" at 22.65,667.76 h47.24
  text "RDY" at 29.86,588.71 h47.24
  text "D" at 1269.12,550.63 h47.24
  text "___" at 37.44,540.37 h47.24
  text "FLT" at 42.57,509.88 h47.24
  text "S" at 1269.5,472.32 h47.24
  text "GATE" at 10.07,431.54 h47.24
  text "G" at 1269.08,393.58 h47.24
  text "12V" at 34.14,352.49 h47.24
  text "S" at 1269.5,314.84 h47.24
  text "12V" at 34.14,273.75 h47.24
  text "GND" at 21.3,195.32 h47.24
  text "GND" at 21.3,116.58 h47.24
  text "GND" at 21.3,37.84 h47.24
M1 Outline:
  the board outline again, w7.87

## Dimensions
0,-423.23 to 0,807.09 on M2 Dimensions

## Text inside footprints (layer, text, board x,y; h text height)
D4: Bottom Overlay "K" at 1191.34,271.52 h47.24 r180
D5: Bottom Overlay "K" at 1023.23,378.08 h47.24
"DCDC 12-3V3": Bottom Overlay "-Vout" at 748.03,-167.32 h47.24 r90; Bottom Overlay "-Vin" at 442.91,-177.17 h47.24 r90; Bottom Overlay "+Vin" at 344.49,-167.32 h47.24 r90; Bottom Overlay "+Vout" at 944.88,-167.32 h47.24 r90
"DCDC 12-15": Bottom Overlay "-Vout" at 754.33,228.81 h47.24 r90; Bottom Overlay "-Vin" at 511.81,305.12 h47.24 r90; Bottom Overlay "+Vin" at 285.43,314.96 h47.24 r90; Bottom Overlay "+Vout" at 955.12,224.87 h47.24 r90